# EAGLE board Agua (EAGLE 3.55)
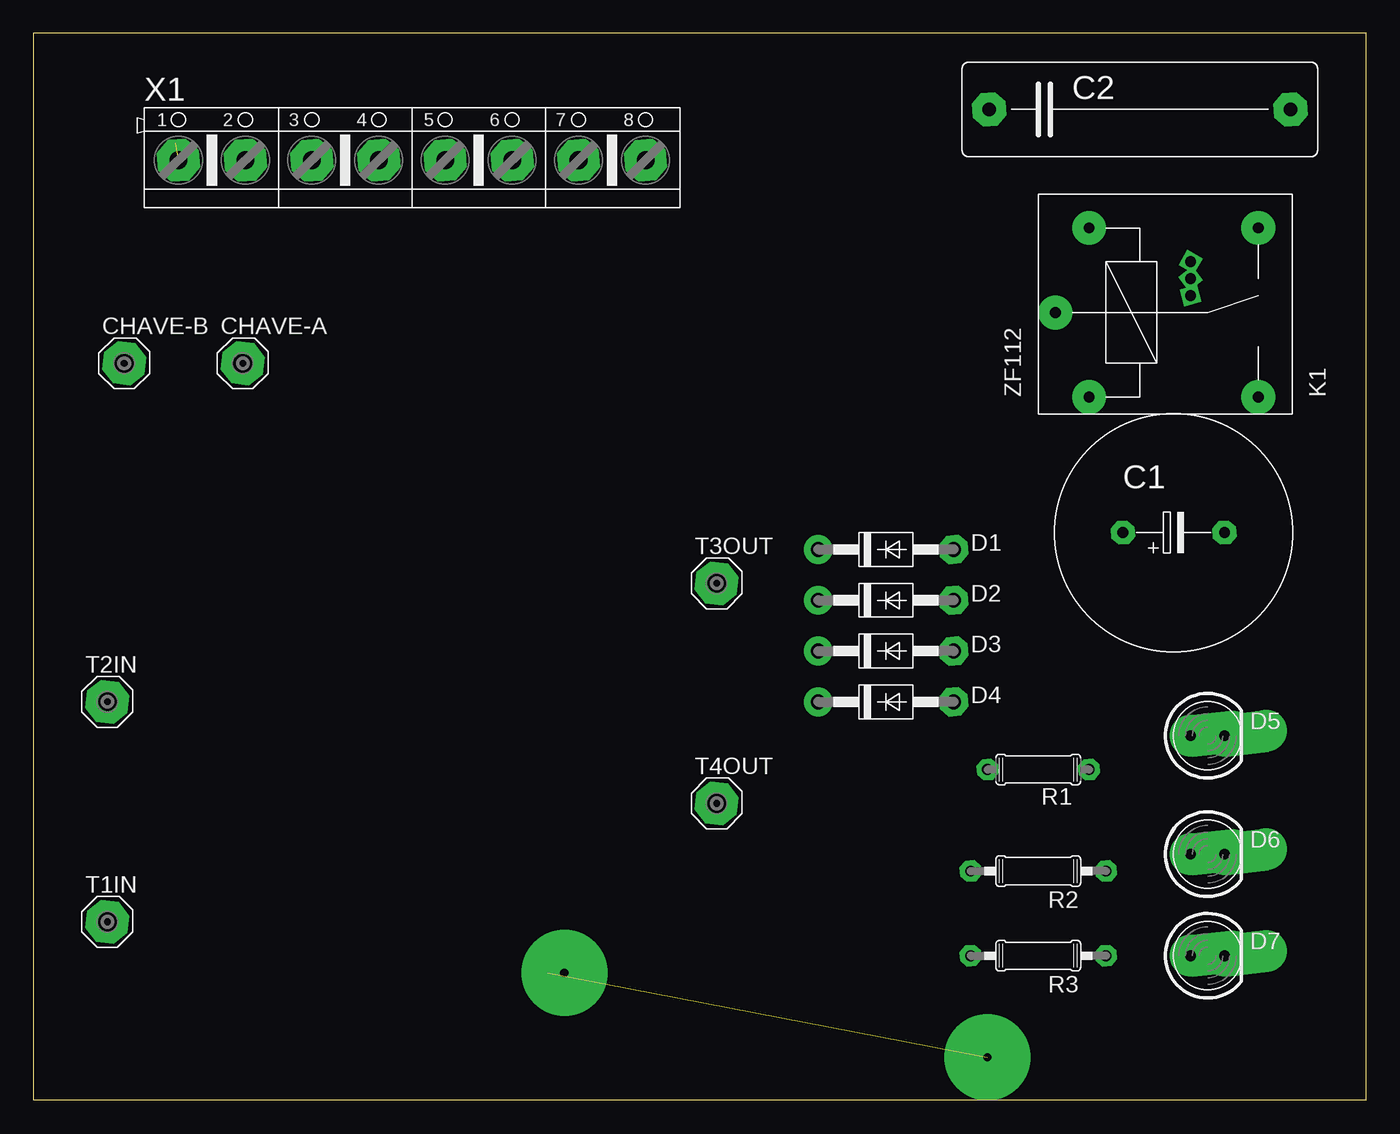
[diagram p0: board, top side]
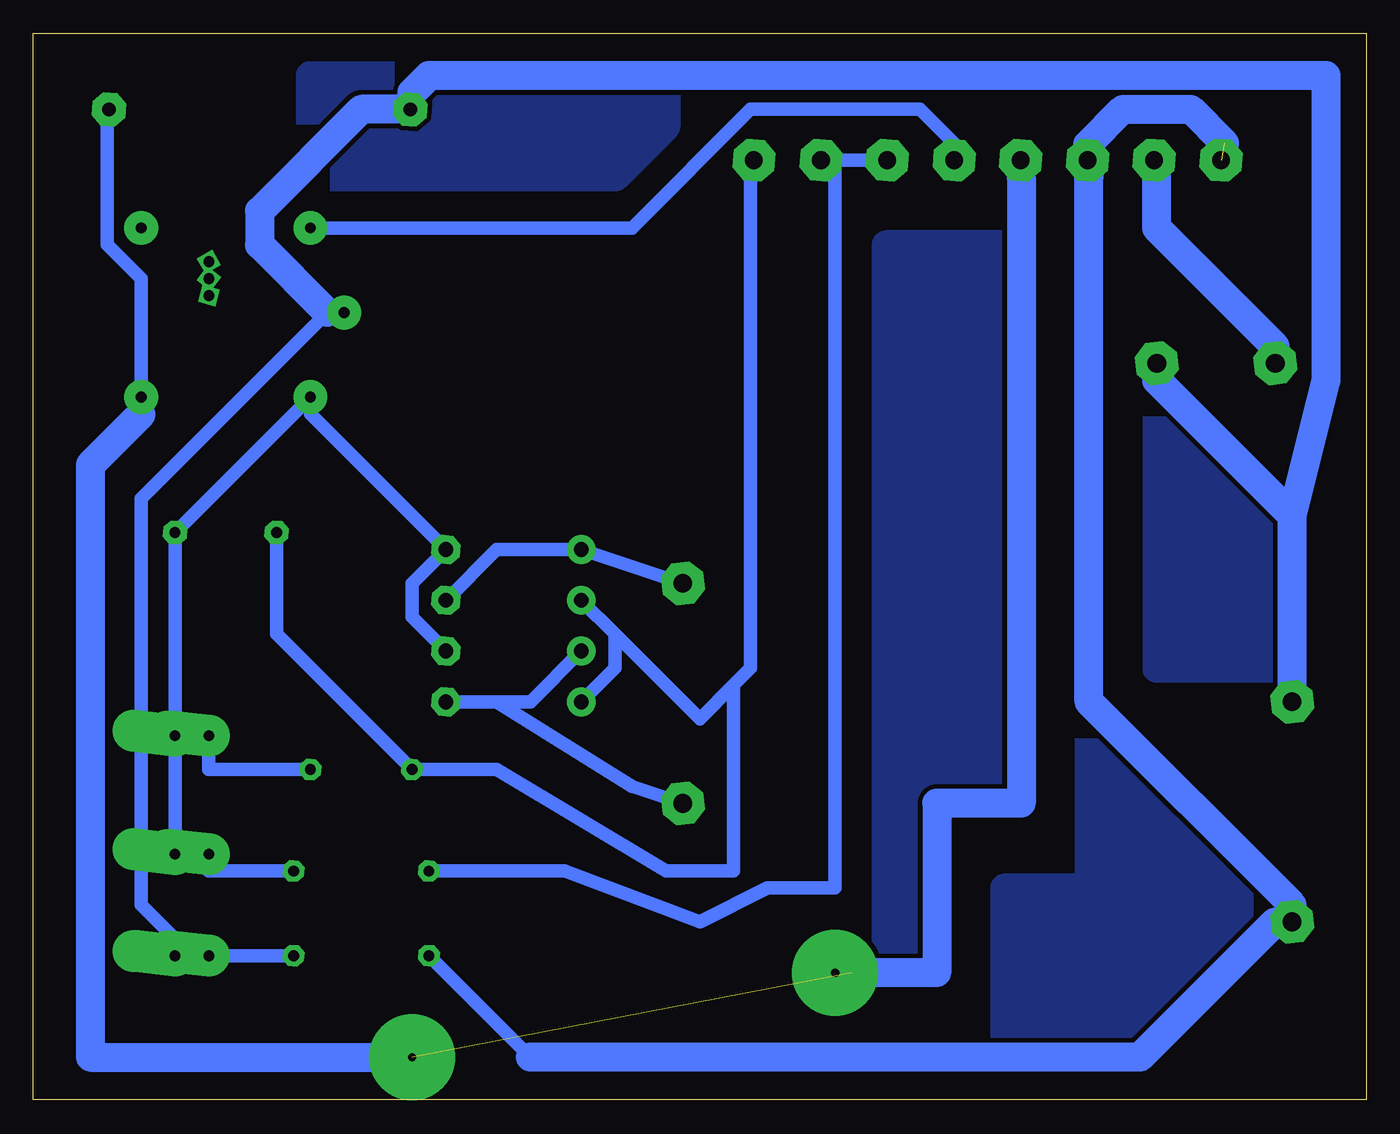
[diagram p1: board, bottom side, seen from below]

Size 100 x 80 mm. Coordinates in mm from the lower left corner, seen from the top.
Outline: 0,0 100,0 100,80 0,80 0,0
Copper layers used: Bottom

## Footprints (pad centres in the part's own frame; a part is rotated, then mirrored left to right if it is on the bottom)
-7,5 = drill 0.813 pad 1.778 octagon:  -3.81,0;  3.81,0
2,5B7 = drill 1.016 pad 2.54 octagon:  -11.303,0;  11.303,0
14E = drill 1.397 pad 3.175 octagon:  0,0
41-10 = drill 1.118 pad 2.159 octagon:  5.08,0 | drill 1.118 pad 2.159 round:  -5.08,0
D5E = drill 0.813 pad 3.15 offset:  -1.27,0;  1.27,0
AITEC = drill 0.813 pad 2.54 round: 1 -8.89,6.35; 2 -8.89,-6.35; UM -11.43,0;  3.81,6.35;  3.81,-6.35 | drill 0.813 pad 0.254 square:  -1.27,3.81;  -1.27,2.54;  -1.27,1.27
07/7 = drill 0.813 pad 1.6 octagon:  -3.81,0;  3.81,0
07/10 = drill 0.813 pad 1.6 octagon:  -5.08,0;  5.08,0
500/8 = drill 1.321 pad 3.15 octagon:  -17.526,0;  -12.497,0;  -7.518,0;  -2.489,0;  2.489,0;  7.518,0;  12.497,0;  17.526,0

## Placement (x,y rotation side)
C1  2200UF  [-7,5]  85.56,42.54 0 top
C2  330K  [2,5B7]  83.02,74.29 0 top
CHAVE-A  SE14E  [14E]  15.71,55.24 0 top
CHAVE-B  SE14E  [14E]  6.82,55.24 0 top
D1  1N4004  [41-10]  63.97,41.27 0 top
D2  1N4004  [41-10]  63.97,37.46 0 top
D3  1N4004  [41-10]  63.97,33.65 0 top
D4  1N4004  [41-10]  63.97,29.84 0 top
D5  ON  [D5E]  88.1,27.3 0 top
D6  CAIXA VAZIA  [D5E]  88.1,18.41 0 top
D7  BOMBA ON  [D5E]  88.1,10.79 0 top
K1  ZF112  [AITEC]  88.1,59.05 0 top
R1  470  [07/7]  75.4,24.76 180 top
R2  470  [07/10]  75.4,17.14 180 top
R3  5K7  [07/10]  75.4,10.79 180 top
T1IN  SE14E  [14E]  5.55,13.33 0 top
T2IN  SE14E  [14E]  5.55,29.84 0 top
T3OUT  SE14E  [14E]  51.27,38.73 0 top
T4OUT  SE14E  [14E]  51.27,22.22 0 top
X1  AK500/8  [500/8]  28.41,70.48 0 top

## Library data of the parts
C1 = discrete
C2 = cap
CHAVE-A CHAVE-B T1IN T2IN T3OUT T4OUT = solpad
D1-D4 = diode
D5-D7 = led
K1 = Reles
R1-R3 = r
X1 = ptr500

## Nets
GROSSA1: R3. T1IN. X1.
GROSSA2: C2. K1. X1.
GROSSA3: C2. CHAVE-A. D7. K1.UM T2IN.
GROSSA4: CHAVE-B. X1.
N$6: C1. D2. D4. R1. X1.
N$7: C1. D1. D3. D5. D6. K1.2
N$8: D1. D2. T3OUT.
N$9: D3. D4. T4OUT.
N$10: R2. X1.
N$11: K1.1 X1.
N$12: D5. R1.
N$13: D6. R2.
N$14: D7. R3.

## Tracks (layer width: path | path; a pad name or v marks a point on that pad's centre or on a via)
GROSSA1  (1 unrouted)
  Bottom 1.016: 62.7,3.17 R3. | 6.82,13.33 T1IN. 5.55,14.6 | 20.79,69.21 20.89,70.48
  Bottom 2.184: 62.7,3.17 16.98,3.17 6.82,13.33 | 20.79,69.21 20.79,29.84 5.55,14.6 | 20.89,70.48 20.89,71.65 18.25,74.29 13.17,74.29 10.63,71.75
GROSSA2  (via drill 0.61 pad 6.45)  (1 unrouted)
  Bottom 1.016: C2. 94.45,73.02 94.45,64.13 91.91,61.59 91.91,52.7 91.91,51.43 | 25.87,69.21 25.92,70.48
  Bottom 2.184: 91.91,51.43 95.72,47.62 95.72,3.17 v71.59,3.17 | 25.87,69.21 25.87,22.22 32.22,22.22 32.22,9.52 38.57,9.52
GROSSA3
  Bottom 1.016: 15.71,53.97 CHAVE-A. | D7. 89.37,12.06 91.91,14.6 91.91,45.08 77.94,59.05 K1.UM | 71.59,75.56 71.72,74.29
  Bottom 2.184: T2IN. 5.55,43.81 | 77.94,59.05 83.02,64.13 83.02,66.67 75.4,74.29 71.72,74.29 | 5.55,43.81 15.71,53.97 | 5.55,43.81 3.01,53.97 3.01,76.83 70.32,76.83 71.59,75.56
GROSSA4
  Bottom 1.016: 15.71,69.21 15.91,70.48 | CHAVE-B. 6.82,56.51
  Bottom 2.184: 15.71,69.21 15.71,65.4 6.82,56.51
N$1
  pour Bottom (isolate 0.356): 25.87,64.13 36.03,64.13 36.03,9.52 32.22,9.52 32.22,22.22 25.87,22.22 25.87,61.59
  pour Bottom (isolate 0.356): 20.79,28.57 20.79,3.17 16.98,3.17 5.55,14.6
  pour Bottom (isolate 0.356): 20.79,15.87 27.14,15.87 27.14,3.17 22.06,3.17
  pour Bottom (isolate 0.356): 15.71,52.7 15.71,32.38 5.55,32.38 5.55,45.08 13.17,52.7
  pour Bottom (isolate 0.356): 52.54,75.56 52.54,73.02 56.35,69.21 79.21,69.21 79.21,76.83 52.54,76.83
N$2  (via drill 0.61 pad 6.45)
  other vias: 39.84,9.52
N$6
  Bottom 1.016: 81.75,42.54 81.75,34.92 R1. 65.24,24.76 52.54,17.14 47.46,17.14 47.46,31.11 | D4. 56.35,32.38 56.35,34.92 | 56.35,34.92 D2. | 47.46,31.11 50,28.57 56.35,34.92 | 47.46,31.11 46.19,32.38 46.19,69.21 X1.
N$7
  Bottom 1.016: D6. D5. C1. K1.2 79.21,51.43 69.05,41.27 71.59,38.73 71.59,36.19 69.05,33.65
N$8
  Bottom 1.016: T3OUT. D1. 65.24,41.27 69.05,37.46
N$9
  Bottom 1.016: D3. 62.7,29.84 65.24,29.84 | 65.24,29.84 69.05,29.84 | 65.24,29.84 55.08,23.49 T4OUT.
N$10
  Bottom 1.016: R2. 60.16,17.14 50,13.33 44.92,15.87 39.84,15.87 39.84,70.48 | 39.84,70.48 35.93,70.48 | 39.84,70.48 40.91,70.48
N$11
  Bottom 1.016: K1.1 55.08,65.4 46.19,74.29 33.49,74.29 30.95,71.75 30.9,70.48
N$12
  Bottom 1.016: 79.21,24.76 86.83,24.76 86.83,27.3
N$13
  Bottom 1.016: 80.48,17.14 86.83,17.14 86.83,18.41
N$14
  Bottom 1.016: 80.48,10.79 86.83,10.79